# Altium PCB USB-SW.PcbDoc
Units mm, origin at the board's own origin, x right, y up, seen from the top; angles counter-clockwise.
Board outline 40 x 15 mm, 2 copper layers (Top Layer, Bottom Layer), stack 1.57 mm thick; 30 components, 22 nets, 96 pads, 16 vias.
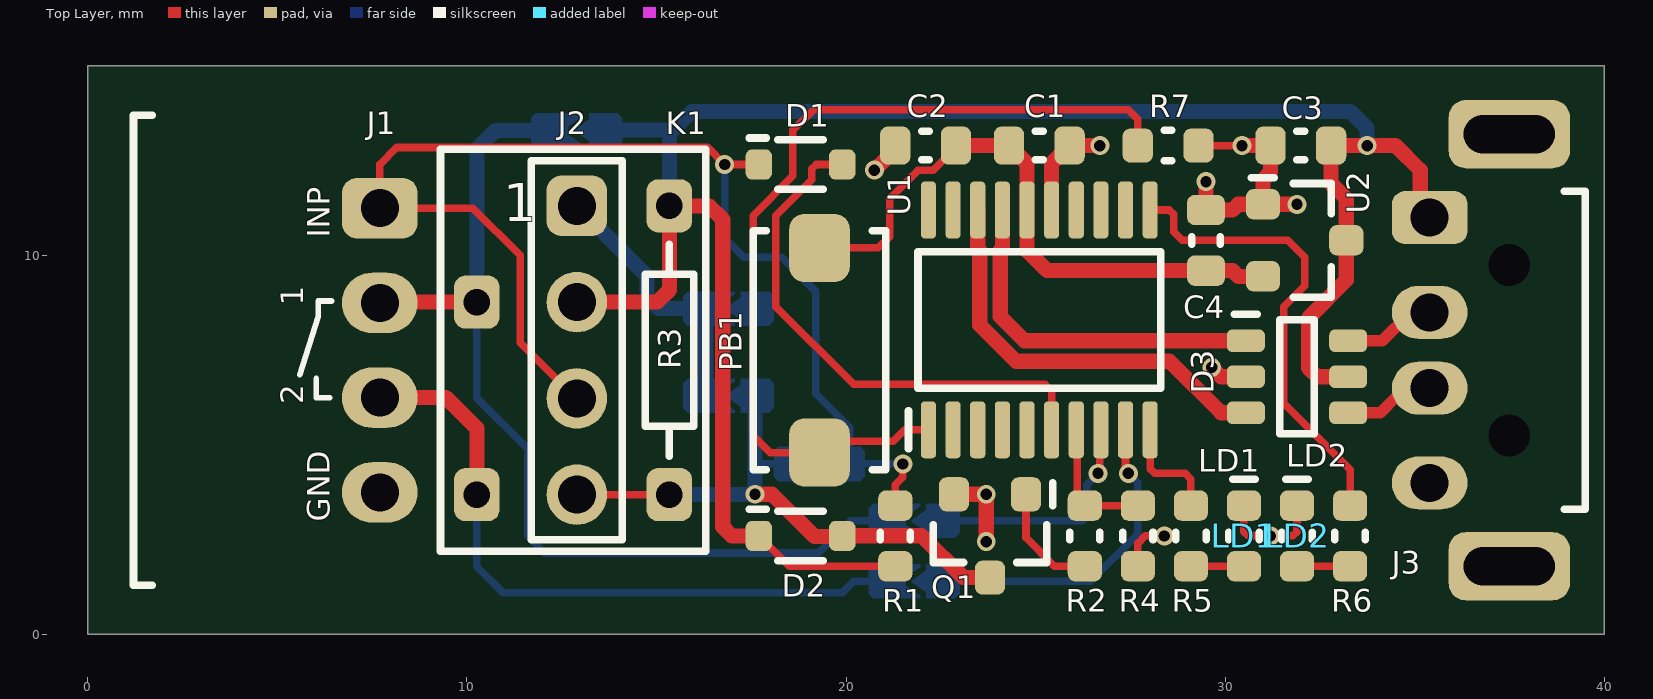
[diagram p0: Top Layer view]
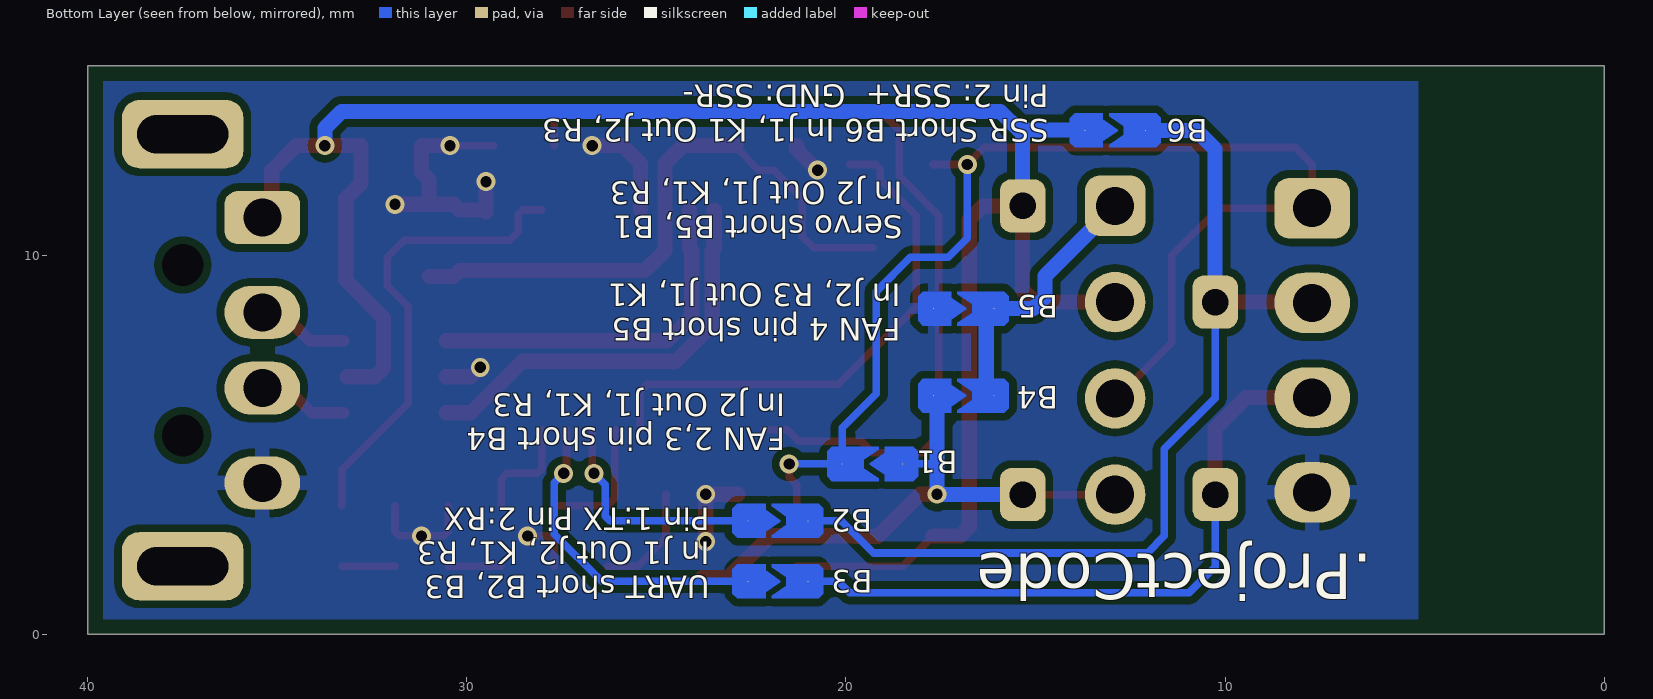
[diagram p1: Bottom Layer view, seen from below]

## Layer stack, top to bottom
Top Solder: solder mask 0.01, SM-001, Dk 3.8
Top Layer: signal copper 0.035
Dielectric 1: core 1.5, FR-4 TG140, Dk 4.5
Bottom Layer: signal copper 0.035
Bottom Solder: solder mask 0.01, SM-001, Dk 3.8

## Board outline
0,0 40,0 40,15 0,15

## Design rules (kind name [scope] priority, off if disabled: settings)
AcuteAngle [All] p1: minimum=6.00000000000000E+0001 checktracksonly=TRUE
AssemblyTestpoint [All] p1: testpointundercomponent=TRUE minsize=1 maxsize=2.5 preferedsize=1.5 minholesize=0 maxholesize=1 preferedholesize=0.8 testpointgrid=0.025 usegrid=TRUE gridtolerance=0 allowsidetop=TRUE allowsidebottom=TRUE
BoardOutlineClearance [(OnLayer('Top Layer') OR OnLayer('Bottom Layer'))] p1: gap=0.4 ignorepadtopadclearanceinfootprint=FALSE
Clearance [All] p1: gap=0.2 ignorepadtopadclearanceinfootprint=FALSE except(0: Arc-Text Track-Text Via-Text Fill-Text Poly-Text Region-Text; 0.1: Arc-Arc Arc-Track Arc-SMDPad Track-Track Track-SMDPad; 0.15: SMDPad-SMDPad; 0.3: Arc-THPad Track-THPad SMDPad-THPad; 0.45: THPad-THPad THPad-Hole)
ComponentClearance ComponentClearance_Special_1 [(InComponent('J1') OR InComponent('J2') OR InComponent('K1') OR InComponent('R3')) vs (InComponent('J1') OR InComponent('J2') OR InComponent('K1') OR InComponent('R3'))] p1: gap=0 collisioncheckmode=3 verticalgap=0 showdistances=FALSE
ComponentClearance ComponentClearance_Special_2 [Footprint Like('_SMD-JUMP-*')] p2: gap=0 collisioncheckmode=3 verticalgap=0 showdistances=FALSE
ComponentClearance ComponentClearance_FID [Footprint Like('FID-1*')] p3: gap=0 collisioncheckmode=3 verticalgap=0 showdistances=FALSE
ComponentClearance [All] p4: gap=0.2 collisioncheckmode=3 verticalgap=0.2 showdistances=FALSE
DiffPairsRouting USB_DiffPairsRouting [InDifferentialPair ('USB_D') Or InDifferentialPair ('USB_CON_D')] p1: maxlimit=0.14 minlimit=0.1 mostfreqgap=0.14 toplayer_minwidth=0.3 toplayer_maxwidth=0.4 toplayer_prefwidth=0.4 bottomlayer_minwidth=0.3 bottomlayer_maxwidth=0.4 bottomlayer_prefwidth=0.4 maxuncoupledlength=10
FabricationTestpoint [All] p1: side=3 testpointundercomponent=TRUE minsize=1 maxsize=2.5 preferedsize=1.5 minholesize=0 maxholesize=1 preferedholesize=0.8 testpointgrid=0.025 allowsidetop=TRUE allowsidebottom=TRUE usegrid=TRUE gridtolerance=0
Height [All] p1: minheight=0 maxheight=50 prefheight=12
HoleSize HoleSize_NPTH [isPad AND NOT PadIsPlated AND NOT HasSlotHole AND IsPadHoleValid] p1: absolutevalues=TRUE maxlimit=100 minlimit=0.5 maxpercent=80.000 minpercent=20.000
HoleSize HoleSize_NPT_Slot [isPad AND NOT PadIsPlated AND HasSlotHole AND IsPadHoleValid] p2: absolutevalues=TRUE maxlimit=10 minlimit=1 maxpercent=80.000 minpercent=20.000
HoleSize HoleSize_PT_Slot [isPad AND PadIsPlated AND HasSlotHole AND IsPadHoleValid] p3: absolutevalues=TRUE maxlimit=10 minlimit=0.5 maxpercent=80.000 minpercent=20.000
HoleSize HoleSize_Pad [IsPad] p4: absolutevalues=TRUE maxlimit=100 minlimit=0.15 maxpercent=80.000 minpercent=20.000
HoleSize HoleSize_Via [IsVia] p5: absolutevalues=TRUE maxlimit=1 minlimit=0.15 maxpercent=80.000 minpercent=20.000
HoleToHoleClearance HoleToHoleClearance_Special_1 [(InComponent('K1') OR InComponent('R3')) vs (InComponent('K1') OR InComponent('R3'))] p1: gap=0 allowstackedmicrovias=TRUE
HoleToHoleClearance HoleToHoleClearance_Via [IsVia vs IsVia] p2: gap=0.2 allowstackedmicrovias=TRUE
HoleToHoleClearance HoleToHoleClearance_Pad [IsPad vs IsPad] p3: gap=0.45 allowstackedmicrovias=TRUE
MatchedLengths USB_MatchedLengths [InDifferentialPair ('USB_D') Or InDifferentialPair ('USB_CON_D')] p1: tolerance=25.4 checknetsindiffpair=FALSE checkdiffpairvsdiffpair=TRUE checkxsignals=TRUE checkothers=TRUE usedelayunits=TRUE delaytolerance=50.000000
MinimumAnnularRing MinimumAnnularRing_NPTH [IsPad AND(PadIsPlated = 'False') AND IsPadHoleValid AND (PadXSize_AllLayers > 0) AND (PadYSize_AllLayers > 0)] p1: minimumring=0
MinimumAnnularRing MinimumAnnularRing_Pad [IsPad] p2: minimumring=0.2
MinimumAnnularRing MinimumAnnularRing_Via [IsVia] p3: minimumring=0.1
MinimumSolderMaskSliver [All] p1: minsoldermaskwidth=0.2
ParallelSegment [All] p1: limit=200 gap=0.2
PlaneClearance PlaneClearance_Pad [isPad AND PadIsPlated AND IsPadHoleValid] p1: clearance=0.3
PlaneClearance PlaneClearance_Via [isVia] p2: clearance=0.2
PlaneConnect [All] p1: planeconnectstyle=Direct reliefexpansion=0.5 reliefentries=4 reliefconductorwidth=0.2 reliefairgap=0.2
PolygonConnect [All] p1: thpad.connectstyle=Relief thpad.reliefconductorwidth=0.4 thpad.reliefentries=4 thpad.polygonreliefangle="90 Angle" thpad.airgapwidth=0.2 smdpad.connectstyle=Relief smdpad.reliefconductorwidth=0.3 smdpad.reliefentries=4 smdpad.polygonreliefangle="90 Angle" smdpad.airgapwidth=0.2 via.connectstyle=Direct via.reliefconductorwidth=0.2 via.reliefentries=4 via.polygonreliefangle="90 Angle" via.airgapwidth=0.2
ReturnPath [All] p1: impedanceprofileid={BD79DF51-9608-4572-B51F-E232A1A7B7A7} _gaplimit=0.5
RoutingCorners [All] p1: cornerstyle=45-Degree minsetback=0.4 maxsetback=2
RoutingTopology [All] p1: topology=Daisy_Simple
RoutingVias [All] p1: holewidth=0.3 width=0.5 viastyle="Through Hole" minholewidth=0.15 minwidth=0.25 maxholewidth=1 maxwidth=2
SMDEntry [All] p1: side=TRUE corner=TRUE anyangle=TRUE
SMDToCorner [All] p1: distance=39370
SilkToSilkClearance SilkToSilkClearancePad [IsPad] p1: silktosilkclearance=0.15
SilkToSilkClearance [All] p2: silktosilkclearance=0.1
SilkToSolderMaskClearance [All] p1: minsilkscreentomaskgap=0.1 clearancetoexposedcopper=TRUE
SolderMaskExpansion SolderMaskExpansion_NPTH [isPad AND(PadIsPlated = 'False') AND IsPadHoleValid AND (PadXSize_AllLayers = 0) AND (PadYSize_AllLayers = 0)] p1: expansion=0.1 istentingtop=FALSE soldermaskfromhole=TRUE
SolderMaskExpansion SolderMaskExpansion_Pad [isPad] p2: expansion=0.04 istentingtop=FALSE
SolderMaskExpansion SolderMaskExpansion_Via [IsVia] p3: expansion=0.05 istentingtop=TRUE
StubLength [All] p1: limit=4
SupplyNets SupplyNets_GND [InNet('GND')] p1: voltage=0.000
SupplyNets SupplyNets+5V [InNet('+5V')] p2: voltage=5.000
SupplyNets SupplyNets+3V3 [InNet('+3V3')] p3: voltage=3.300
UnRoutedNet [All] p1: checkbadconnections=TRUE
ViasUnderSMD [All] p1: allowed=FALSE
Width [All] p1: maxlimit=5 minlimit=0.1 preferedwidth=0.2 minimp=50.000000 maximp=50.000000 favimp=50.000000
15 further rules are at their usual default settings.

## Classes and differential pairs
differential pair USB_CON_D: +USB_CON_D_P -USB_CON_D_N
differential pair USB_D: +USB_D_P -USB_D_N

## Components (designator, comment, footprint, x,y, rotation, side; value= is the part's Value field where it differs from the comment)
B1 "_SMD-JUMP-0603" _SMD-JUMP-0603 19.3,4.5 r0 bottom
B2 "_SMD-JUMP-0603" _SMD-JUMP-0603 21.8,3 r180 bottom
B3 "_SMD-JUMP-0603" _SMD-JUMP-0603 21.8,1.4 r180 bottom
B4 "_SMD-JUMP-0603" _SMD-JUMP-0603 16.9,6.3 r180 bottom
B5 "_SMD-JUMP-0603" _SMD-JUMP-0603 16.9,8.6 r180 bottom
B6 "_SMD-JUMP-0603" _SMD-JUMP-0603 12.9,13.3 r180 bottom
C1 "100nF" C0603-H90 25.1,12.9 r180 top value=100n
C2 "1µF" C0603-H90 22.1,12.9 r0 top value=1u
C3 "1µF" C0603-H90 32,12.9 r0 top value=1u
C4 "1µF" C0603-H90 29.5,10.4 r270 top value=1u
D1 "MBR0530T1G" SOD-323 18.8,12.4 r0 top
D2 "MBR0530T1G" SOD-323 18.8,2.6 r0 top
D3 "USBLC6-4SC6" SOT-236 31.9,6.8 r0 top
J1 "S4B-XH-A(LF)(SN)" "JST S4B-XH-A" 7.7,7.5 r270 top
J2 "CO975" FAN-HDR-4P-90DEG 12.9,7.5 r0 top
J3 "48037-0001" 48037-0001 37.5,7.5 r90 top
K1 "G6L-1P-DC5" G6L-1P 12.8,7.5 r0 top
LD1 "LTST-C191KRKT" LED-0603-R 30.5,2.6 r270 top
LD2 "LTST-C191KGKT" LED-0603-G 31.9,2.6 r270 top
PB1 "SKQMAQE010" SKQMA-SERIE 19.3,7.5 r270 top
Q1 "BSS138K-13" SOT-23 23.8,2.6 r270 top
R1 "10KΩ" R0603-H55 21.3,2.6 r270 top value=10K
R2 "470Ω" R0603-H55 26.3,2.6 r90 top value=470
R3 "10KΩ" RAXIAL-1/8W 15.34,7.5 r180 top value=10K
R4 "10KΩ" R0603-H55 27.7,2.6 r90 top value=10K
R5 "470Ω" R0603-H55 29.1,2.6 r270 top value=470
R6 "470Ω" R0603-H55 33.3,2.6 r270 top value=470
R7 "10KΩ" R0603-H55 28.5,12.9 r180 top value=10K
U1 "STM32F070F6P6" TSSOP-20 25.1,8.3 r90 top
U2 "AP7313-33SRG-7" SOT-23 32.1,10.4 r0 top

## Footprints (in the part's own frame and the unit in brackets; to place one, negate y for a bottom-side part, rotate by r counter-clockwise, add the part's x,y. Pads: shape width x height; smd on the part's side, far side on the other; paste and mask are expansions set on the pad)
48037-0001 [mm] "USB Connectors type A plug 4 pin Horizontal"
  rrect50% 1.4x2 hole 1: 1(3.5,2.1)
  oval 1.4x2 hole 1: 2(1,2.1) 3(-1,2.1) 4(-3.5,2.1)
  round 0 hole 1.1 unplated: MH(-2.25,0) MH(2.25,0)
  rrect50% 1.8x3.2 hole 2.4 slot 1 at 0 deg: S(-5.7,0) S(5.7,0)
  body extent -6.35,-17.8 6.35,2.23, height 3.08
_SMD-JUMP-0603 [mil] "Option jumper smd 0603"
  round 1 smd paste-99999 mask+1.97: 1(-31.1,0) 2(31.5,0)
  Top Layer region: 47.24,-12.99 42.52,-17.72 9.84,-17.72 -6.3,-17.72 -6.3,-14.96 9.06,-4.33 9.06,4.33 -6.3,14.96 -6.3,17.72 9.84,17.72 42.52,17.72 47.24,12.99
  Top Layer region: -12.6,11.42 2.76,0.79 2.76,-0.79 -12.6,-11.42 -12.6,-17.72 -42.13,-17.72 -47.24,-12.6 -47.24,12.6 -42.13,17.72 -12.6,17.72
C0603-H90 [mm] "Chip Capacitor, 2-Leads, Body 1.60x0.80mm, IPC Medium Density"
  rrect50% 0.8x1 smd: 1(-0.8,0) 2(0.8,0)
  silkscreen extent -0.1,-0.37 0.1,0.38, body extent -0.8,-0.4 0.8,0.4, height 0.9
FAN-HDR-4P-90DEG [mm] "FAN Header - 90 Deg - 1 Row - 4 Pos"
  rrect50% 1.6x1.6 hole 1: 1(0,3.81)
  round 1.6 hole 1: 2(0,1.27) 3(0,-1.27) 4(0,-3.81)
  silkscreen extent -1.2,-5 1.2,5, body extent -13.35,-5.4 0.33,5.4, height 6.36
G6L-1P [mm] "Relay G6L-1P series"
  rrect50% 1.2x1.4 hole 0.7: 2(-2.54,1.27) 4(-2.54,-3.81) 5(2.54,-3.81) 8(2.54,3.81)
  silkscreen extent -3.5,-5.3 3.5,5.3, body extent -3.5,-5.3 3.5,5.3, height 4.11
"JST S4B-XH-A" [mm] "Connector JST S4B-XH-A"
  rrect50% 1.6x2 hole 1: 1(-3.75,0)
  oval 1.6x2 hole 1: 2(-1.25,0) 3(1.25,0) 4(3.75,0)
  silkscreen extent -6.2,-6.5 6.2,-6, body extent -6.2,-9.2 6.2,2.3, height 6.15
LED-0603-G [mm] "Chip LED, Green, 2-Leads, Body 1.60x0.8mm, IPC Medium Density"
  rrect50% 0.8x0.9 smd: 1(-0.8,0) 2(0.8,0)
  silkscreen extent -1.5,-0.4 0.1,0.4, body extent -0.8,-0.4 0.8,0.4, height 0.55
LED-0603-R [mm] "Chip LED, Red, 2-Leads, Body 1.60x0.8mm, IPC Medium Density"
  rrect50% 0.8x0.9 smd: 1(-0.8,0) 2(0.8,0)
  silkscreen extent -1.5,-0.4 0.1,0.4, body extent -0.8,-0.4 0.8,0.4, height 0.55
R0603-H55 [mm] "Chip Resistor, 2-Leads, Body 1.60x0.80mm, IPC Medium Density"
  rrect50% 0.8x0.9 smd: 1(-0.8,0) 2(0.8,0)
  silkscreen extent -0.1,-0.4 0.1,0.4, body extent -0.8,-0.4 0.8,0.4, height 0.55
RAXIAL-1/8W [mm] "Resitor Axial through Hole 1/8 W"
  rrect50% 1.2x1.4 hole 0.7: 1(0,3.81) 2(0,-3.81)
  silkscreen extent -0.64,-2 0.64,2, body extent -1,-4.01 1,4.01, height 2
SKQMA-SERIE [mm] "Tacticle Switch"
  rrect50% 1.8x1.6 smd: 1(-2.7,0) 2(2.7,0)
  silkscreen extent -3.15,-1.75 3.15,1.75, body extent -3.15,-1.75 3.15,1.75, height 4.31
SOD-323 [mm] "SODJL, 2-Leads,"
  rrect50% 0.7x0.8 smd: 1(-1.1,0) 2(1.1,0)
  silkscreen extent -1.35,-0.65 0.6,0.7, body extent -1.34,-0.65 1.34,0.65, height 0.95
SOT-23 [mm] "SOT23, 3-Leads, Body 2.90x2.45mm, Pitch 0.95mm, IPC Medium Density"
  rrect50% 0.9x0.8 smd: 1(-1.1,0.95) 2(-1.1,-0.95) 3(1.1,0)
  silkscreen extent -1.4,-1.5 0.7,1.65, body extent -1.25,-1.5 1.25,1.5, height 1.1
SOT-236 [mm] "SOT23, 6-Leads, Body 2.85x2.80mm, Pitch 0.95mm, IPC Medium Density"
  rrect50% 1x0.6 smd: 1(-1.35,0.95) 2(-1.35,0) 3(-1.35,-0.95) 4(1.35,-0.95) 5(1.35,0) 6(1.35,0.95)
  silkscreen extent -1.65,-1.5 0.45,1.65, body extent -1.5,-1.5 1.5,1.5, height 1.45
TSSOP-20 [mm] "TSSOP 20 Pin"
  rrect50% 1.5x0.4 smd: 1(-2.9,2.925) 2(-2.9,2.275) 3(-2.9,1.625) 4(-2.9,0.975) 5(-2.9,0.325) 6(-2.9,-0.325) 7(-2.9,-0.975) 8(-2.9,-1.625) 9(-2.9,-2.275) 10(-2.9,-2.925) 11(2.9,-2.925) 12(2.9,-2.275) 13(2.9,-1.625) 14(2.9,-0.975) 15(2.9,-0.325) 16(2.9,0.325) 17(2.9,0.975) 18(2.9,1.625) 19(2.9,2.275) 20(2.9,2.925)
  silkscreen extent -3.4,-3.2 1.8,3.45, body extent -3.2,-3.25 3.2,3.25, height 1.2

## Part data
B1 B2 B3 B4 B5 B6: "Option Jumper smd 0603", Case=0603, Mount="Surface Mount"
C1: library part CGA3E2X7R1H104K080AA, "Cap 0603 Case Ceramic 100nF 50V X7R", Case=0603, Dielectric=X7R, Manufacturer=TDK, Voltage Rating=50V, Capacitance=100nF, ComponentLink1Description="Data Sheet", ComponentLink1URL=https://product.tdk.com/system/files/dam/doc/product/capacitor/ceramic/mlcc/catalog/mlcc_commercial_general_en.pdf, Manufacturer Part Number=CGA3E2X7R1H104K080AA, Mount="Surface Mount"
C2 C3 C4: library part C1608X7R1C105K080AC, "Cap 0603 Case Ceramic 1uF 16V X7R", Capacitance=1uF, Case=0603, Dielectric=X7R, Manufacturer=TDK, Voltage Rating=16V, ComponentLink1Description="Data Sheet", ComponentLink1URL=https://www.murata.com/en-eu/products/productdetail?partno=GRM188Z71C475KE21%23, Manufacturer Part Number=C1608X7R1C105K080AC, Mount="Surface Mount"
D1 D2: "Diode Schottky 30V 0.5A 2-Pin SOD-123", Case=SOD-123, Current Rating=0.5A, Manufacturer="ON Semiconductor", ComponentLink1Description="Data Sheet", ComponentLink1URL=https://www.onsemi.com/pdf/datasheet/mbr0530t1-d.pdf, Manufacturer Part Number=MBR0530T1G, Mount="Surface Mount"
D3: "ESD Protection Diodes / TVS Diodes 2 Line 2.5pF USB 2.0 ESD Protect SOT23-6", Case=STO23-6, Manufacturer=STMicroelectronics, ComponentLink1Description="Data Sheet", ComponentLink1URL=https://www.mouser.it/datasheet/2/389/usblc6_2-1852789.pdf, Manufacturer Part Number=USBLC6-4SC6, Mount="Surface Mount"
J1: "Conn Shrouded, Series JST XH, 4 Pos Header,(2.50mm) Through Hole, Right Angle Tin", Current Rating=3A, Manufacturer=JST, Voltage Rating=250V, ComponentLink1Description="Data Sheet", ComponentLink1URL=https://datasheet.ciiva.com/726/exh-726400.pdf, Manufacturer Part Number=S4B-XH-A(LF)(SN), Mount="Through Hole"
J2: library part FC-3+1P-MA, "Conn Post Header - PWM Fan - 90 Deg - 4 Pos - Series KK254", Current Rating=4A, Manufacturer=Moddy, Voltage Rating=250V, ComponentLink1Description="Data Sheet", ComponentLink1URL=https://www.moddiy.com/products/4-Pin-3-Pin-2.54mm-Pitch-2510-Fan-Male-Angled-Connector-Black.html?srsltid=AfmBOopaZVadWC9c1TxHb48VLoAs6cq4o3WMRMmuPV4D0msjLx6o7yLs, Manufacturer Part Number=CO975, Mount="Through Hole"
J3: "Conn USB type A plug 4 pin Horizontal TH", Current Rating=1.5A, Manufacturer=Molex, Voltage Rating=30V, ComponentLink1Description="Data Sheet", ComponentLink1URL=https://www.molex.com/en-us/products/part-detail/480370001, Manufacturer Part Number=48037-0001, Mount="Through Hole"
K1: "Relay Low Signal Sealed SPST-NO 1A 5VDC Through Hole Tube", Manufacturer=Omron, ComponentLink1Description="Data Sheet", ComponentLink1URL=http://www.farnell.com/datasheets/1846831.pdf, Manufacturer Part Number=G6L-1P-DC5, Mount="Through Hole"
LD1: "LED 0603 Top Red 631nm 2-Pin", Case=0603, Manufacturer="Vishay Lite-On", ComponentLink1Description="Data Sheet", ComponentLink1URL=https://optoelectronics.liteon.com/upload/download/DS22-2000-223/LTST-C191KRKT.PDF, Manufacturer Part Number=LTST-C191KRKT, Mount="Surface Mount"
LD2: "LED 0603 Top Green 571nm 2-Pin", Case=0603, Manufacturer="Vishay Lite-On", ComponentLink1Description="Data Sheet", ComponentLink1URL=https://optoelectronics.liteon.com/upload/download/DS22-2000-228/LTST-C191KGKT.PDF, Manufacturer Part Number=LTST-C191KGKT, Mount="Surface Mount"
PB1: "Tactile Switch Rectangular 6.00x3.55mm. Height 4.3mm. J-Lead 50mA 12VDC 260gf SMD", Current Rating="50 mA", Manufacturer="Alps Alpine", Voltage Rating=12V, ComponentLink1Description="Data Sheet", ComponentLink1URL=https://eu.mouser.com/datasheet/2/15/SKQM-1370716.pdf, Manufacturer Part Number=SKQMAQE010, Mount="Through Hole"
Q1: "Mosfet N 50V Vds 20V Vgs ESD 1.4R SOT-23", Case=SOT-23, Manufacturer=Diodes, ComponentLink1Description="Data Sheet", ComponentLink1URL=https://www.diodes.com/assets/Datasheets/BSS138K.pdf, Manufacturer Part Number=BSS138K-13, Mount="Surface Mount"
R1 R4 R7: library part RC0603FR-0710KL, "Resistor 0603 Case 10KR 1% 1/10W", Case=0603, Manufacturer=Yageo, Resistance=10KR, Voltage Rating=150V, ComponentLink1Description="Data Sheet", ComponentLink1URL=https://datasheet.ciiva.com/2519/pyu-r-int-thick-7-2519712.pdf, Manufacturer Part Number=RC0603FR-0710KL, Mount="Surface Mount"
R2 R5 R6: library part RC0603FR-07470RL, "Resistor 0603 Case 470R 1% 1/10W", Case=0603, Manufacturer=Yageo, Resistance=470R, Voltage Rating=150V, ComponentLink1Description="Data Sheet", ComponentLink1URL=https://datasheet.ciiva.com/11808/0900766b8106beab-11808155.pdf, Manufacturer Part Number=RC0603FR-07470RL, Mount="Surface Mount"
R3: library part RNF18FTD10K0, "Resistor Axial 10KR 1% 1/8W 100 ppm", Case="Through Hole", Manufacturer="SEI Stackpole", Resistance=10KR, Voltage Rating=200V, ComponentLink1Description="Data Sheet", ComponentLink1URL=https://www.seielect.com/Catalog/SEI-RNF_RNMF.pdf, Manufacturer Part Number=RNF18FTD10K0, Mount="Through Hole"
U1: "STM32 Arm Cortex-M0 MCU 32 Kbytes of Flash 48 MHz CPU, USB", Case=TSSOP-20, Frequency="48 MHz", Manufacturer=STMicroelectronics, ComponentLink2Description=DataSheet, ComponentLink2URL=http://www.st.com/content/ccc/resource/technical/document/datasheet/31/4f/10/5f/a5/32/46/42/DM00141386.pdf/files/DM00141386.pdf/jcr:content/translations/en.DM00141386.pdf?src-supplier=Digikey, Manufacturer Part Number=STM32F070F6P6, Mount="Surface Mount"
U2: "LDO 3.3V 150mA Out  6Vin 130mV Dropout, Quiescent current 65uA Startup 80µs SOT-23", Case=SOT-223, Manufacturer=Diodes, ComponentLink1Description="Data Sheet", ComponentLink1URL=https://www.diodes.com/assets/Datasheets/AP7313.pdf, Manufacturer Part Number=AP7313-33SRG-7, Mount="Surface Mount"

## Via types
v1: diameter 0.5, hole 0.3, Top Layer to Bottom Layer, tented both sides, 16 vias

## Nets (pads, with @x,y where several pads share a name; then routed paths per layer and width w, separated by ;. In a path a pad name is that pad's centre, name@x,y a point inside that pad or via, vN(x,y) a via of type N, cw(c..) or ccw(c..) an arc to the next point about the centre after c; other vN are vias at no path point)
+3V3: C1.2 C2.2 C4.2 PB1.1 U1.16 U2.2 | length 16.2
  Top Layer w0.2: PB1.1 20.85,10.2 21.15,10.5 21.15,11.5 21.9,12.25 22.296,12.25 22.9,12.854 C2.2
  Top Layer w0.4: C2.2 C1.2 24.775,12.425 U1.16 24.775,10.125 25.3,9.6 C4.2 30.2,9.6 30.35,9.45 U2.2
+5V: B6.1 C3.2 D2.1 D3.5 J2.2 J3.1 K1.8 R1.2 R3.2 U2.3 | length 53.7
  Top Layer w0.2: D2.1 18.5,1.8 R1.2
  Top Layer w0.4: J2.2 15.02,8.77 15.34,9.09 K1.8 16.39,11.31 16.75,10.95 16.75,2.834 16.984,2.6 D2.1 ; D3.5@33.161,6.8 32.434,6.8 32.2,7.034 32.2,8.35 33.2,9.35 U2.3 33.2,11.5 32.8,11.9 C3.2 v1(33.75,12.9) 34.5,12.9 35.15,12.25 35.15,11.25 J3.1
  Bottom Layer w0.4: 13.7,13.31 15.44,13.31 15.93,13.8 33.316,13.8 33.75,13.366 v1(33.75,12.9) ; K1.8 15.34,13.21
COIL-CTL: R2.2 R4.2 U1.7 | length 3.5
  Top Layer w0.2: U1.7 26.1,5.375 26.1,3.6 R2.2 R4.2
GND: B5.1 C1.1 C2.1 C3.1 C4.1 D3.2 J1.4 J3.4 LD1.1 LD2.1 Q1.2 R4.1 R7.1 U1.15 U2.1 | length 17.7
  Top Layer w0.2: R4.1 27.7,2.4 27.9,2.6 v1(28.4,2.6) ; R7.1 v1(30.45,12.9) ; LD1.1 30.5,2.717 30.617,2.6 v1(31.2,2.6) 31.783,2.6 31.9,2.717 LD2.1
  Top Layer w0.4: v1(20.75,12.25) 21.3,12.8 C2.1 ; Q1.2 v1(23.7,3.7) v1(23.7,2.45) ; U1.15 25.425,12.425 C1.1 v1(26.7,12.9) ; C4.1@29.5,11.15 C4.1 ; v1(29.5,11.95) C4.1 ; v1(29.65,7.05) 29.9,6.8 D3.2 ; v1(30.45,12.9) C3.1 31.2,12.2 31,12 U2.1 ; v1(31.9,11.35) U2.1 ; C4.1 30.2,11.2 30.35,11.35 U2.1
IN_TACH: B1.2 D1.1 J1.1 J2.3 R1.1 | length 32.6
  Top Layer w0.2: J2.3 12.87,6.23 11.4,7.7 11.4,10 10.15,11.25 J1.1 7.7,12.4 8.15,12.85 16.35,12.85 v1(16.8,12.4) D1.1 ; R1.1 21.3,3.95 21.5,4.15 v1(21.5,4.5)
  Bottom Layer w0.2: v1(16.8,12.4) 16.8,10.45 17.3,9.95 18.3,9.95 19.2,9.05 19.2,6.35 20.1,5.45 B1.2 v1(21.5,4.5)
IN_TACH_D: D1.2 U1.6 | length 14.1
  Top Layer w0.2: D1.2 19.217,12.4 19.1,12.283 19.1,12 18.15,11.05 18.15,8.65 20.2,6.6 25.25,6.6 25.425,6.425 U1.6
LED_OFF: R6.1 U1.11 | length 12.4
  Top Layer w0.2: U1.11 28.533,11.2 28.65,11.083 28.65,10.625 28.875,10.4 31.65,10.4 32.1,9.95 32.1,9.2 31.55,8.65 31.55,6.1 33.3,4.35 R6.1
LED_ON: R5.1 U1.10 | length 2.9
  Top Layer w0.2: U1.10 28.025,4.367 28.142,4.25 28.95,4.25 29.1,4.1 R5.1
MAN_SW: PB1.2 R7.2 U1.1 | length 23.7
  Top Layer w0.2: U1.1 21.55,5.4 21.25,5.1 19.6,5.1 PB1.2 18,4.8 17.55,5.25 17.55,11.05 18.6,12.1 18.6,13.3 19.15,13.85 27.45,13.85 27.7,13.6 R7.2
NetLD1_2: LD1.2 R5.2 | length 1.4
  Top Layer w0.2: R5.2 LD1.2
NetLD2_2: LD2.2 R6.2 | length 1.4
  Top Layer w0.2: LD2.2 R6.2
NetQ1_1: Q1.1 R2.1 | length 3
  Top Layer w0.2: Q1.1 24.75,2.55 25.5,1.8 R2.1
OUT_PWM: B1.1 B4.1 D2.2 J2.4 K1.5 Q1.3 R3.1 | length 15.5
  Top Layer w0.2: J2.4 K1.5 K1.5@15.4,3.75
  Top Layer w0.4: v1(17.6,3.7) 18.05,3.7 19.165,2.585 19.75,2.585 19.77,2.604 D2.2@19.896,2.604 ; D2.2@19.904,2.604 21.996,2.604 23.1,1.5 Q1.3
  Bottom Layer w0.2: 17.65,4.5 B1.1
  Bottom Layer w0.4: K1.5 17.59,3.69 v1(17.6,3.7) 17.6,4.55 ; 17.65,4.5 17.6,4.55 ; B4.1 17.6,6.21 17.6,4.55
PIN_1: B2.2 B6.2 J1.2 K1.2 | length 25.3
  Top Layer w0.4: J1.2@7.7,8.77 K1.2
  Bottom Layer w0.2: K1.2 10.26,6.24 11.6,4.9 11.6,2.6 12.05,2.15 19.272,2.15 20.122,3 B2.2
  Bottom Layer w0.4: K1.2 10.26,12.81 10.75,13.3 B6.2
PIN_2: B3.2 J1.3 K1.4 | length 17.7
  Top Layer w0.4: J1.3 9.45,6.25 10.26,5.44 K1.4
  Bottom Layer w0.2: K1.4 10.26,1.79 10.95,1.1 19.9,1.1 20.2,1.4 B3.2 B3.2@21.01,1.4
PWM/GND: B4.2 B5.2 J2.1 | length 7.1
  Bottom Layer w0.4: J2.1 14.75,9.46 14.75,8.9 15.05,8.6 B5.2 16.3,8.4 16.3,6.5 B4.2
UART_RX: B3.1 U1.9 | length 8.5
  Top Layer w0.2: U1.9 27.375,4.456 27.393,4.439 27.393,4.307 v1(27.45,4.25)
  Bottom Layer w0.2: B3.1@22.6,1.4 26.45,1.4 27.7,2.65 27.7,4 v1(27.45,4.25)
UART_TX: B2.1 U1.8 | length 6.2
  Top Layer w0.2: v1(26.65,4.25) 26.699,4.299 26.699,5.374 U1.8
  Bottom Layer w0.2: B2.1 26.233,3 26.35,3.117 26.35,3.95 v1(26.65,4.25)
USB_CON_D_N: D3.6 J3.2 | length 2.5
  Top Layer w0.3: D3.6 34.15,7.75 34.9,8.5 J3.2
USB_CON_D_P: D3.4 J3.3 | length 2.4
  Top Layer w0.3: D3.4 34.1,5.85 34.54,6.29 35.19,6.29 J3.3
USB_D_N: D3.1 U1.17 | length 9.6
  Top Layer w0.4: U1.17 24.125,10.185 24.07,10.13 24.07,8.394 24.714,7.75 D3.1
USB_D_P: D3.3 U1.18 | length 11
  Top Layer w0.4: U1.18 23.475,10.185 23.53,10.13 23.53,8.17 24.49,7.21 28.54,7.21 29.9,5.85 D3.3
pads on no net: J3.MH J3.S U1.2 U1.3 U1.4 U1.5 U1.12 U1.13 U1.14 U1.19 U1.20

## Polygon pours and split planes (outlines as drawn)
GND on Bottom Layer "BOTTOM_LAYER_GND" (solid, remove dead copper, pour order 0): 4.9,15 40,15 40,0 4.9,0

## Keep-outs
Keep-Out Layer:
  lines w0.1: 0.5,73 0.5,73

## Silkscreen, mask and mechanical layers (free items; w line width, h text height)
Top Overlay:
  lines w0.15: 5.59,6.852 6.075,8.385 6.075,8.798 6.425,8.798 ; 6.025,6.753 6.025,6.25 6.375,6.25
  lines w0.2: 15.34,4.7 15.34,5.5 ; 15.34,9.5 15.34,10.3 ; 21.05,4.5 21.05,10.5 ; 21.9,6.5 21.9,10.1 ; 38.95,3.3 39.5,3.3 39.5,7.5 39.5,11.7 38.95,11.7
  text "INP" at 6.38,10.47 h0.6 r90
  text "1" at 5.68,8.67 h0.6 r90
  text "2" at 5.68,6.07 h0.6 r90
  text "LD2" at 31.62,4.42 h0.6
  text "LD1" at 29.3,4.3 h0.6
  text "GND" at 6.38,2.981 h0.6 r90
Bottom Overlay:
  text "SSR Short B6 In J1, K1 Out J2, R3 / Pin 2: SSR+  GND: SSR-" at 14.65,14.5 h0.6 r180
  text "Servo short B5, B1 / In J2 Out J1, K1, R3" at 18.5,11.95 h0.6 r180
  text "FAN 4 pin short B5 / In J2, R3 Out J1, K1" at 18.55,9.25 h0.6 r180
  text "FAN 2,3 pin short B4 / In J2 Out J1, K1, R3" at 21.6,6.35 h0.6 r180
  text "UART short B2, B3 / In J1 Out J2, K1, R3 / Pin 1:TX Pin 2:RX" at 23.6,3.35 h0.6 r180
  text ".ProjectCode" at 6.12,2.13 h1.2 r180
Top Solder:
  rectangle: 21.95,10.55 28.25,11.85
  region: 28.25,6.05 21.95,6.05 21.95,4.75 28.25,4.75
Board Shape:
  lines w0.1: 0,0 0,15 40,15 40,0 0,0
  lines w0.2: 4.5,0 4.5,15 ; 4.5,15.9 4.5,34.7
  text "V-SCORE" at 3.91,17.6 h1.2 r90
  text "OPTIONAL BREAK" at 6.41,17.5 h1.2 r90

## Text inside footprints (layer, text, board x,y; h text height)
J2: Top Overlay "1" at 10.95,10.9 h1